# Altium PCB 100869.pcbdoc (part 2 of 3)
Units mm, origin at the board's own origin, x right, y up, seen from the top; angles counter-clockwise.
Board outline 64 x 68 mm, 4 copper layers (Top Layer, Ground, Power, Bottom Layer), stack 1.551 mm thick; 165 components, 69 nets, 488 pads, 282 vias.
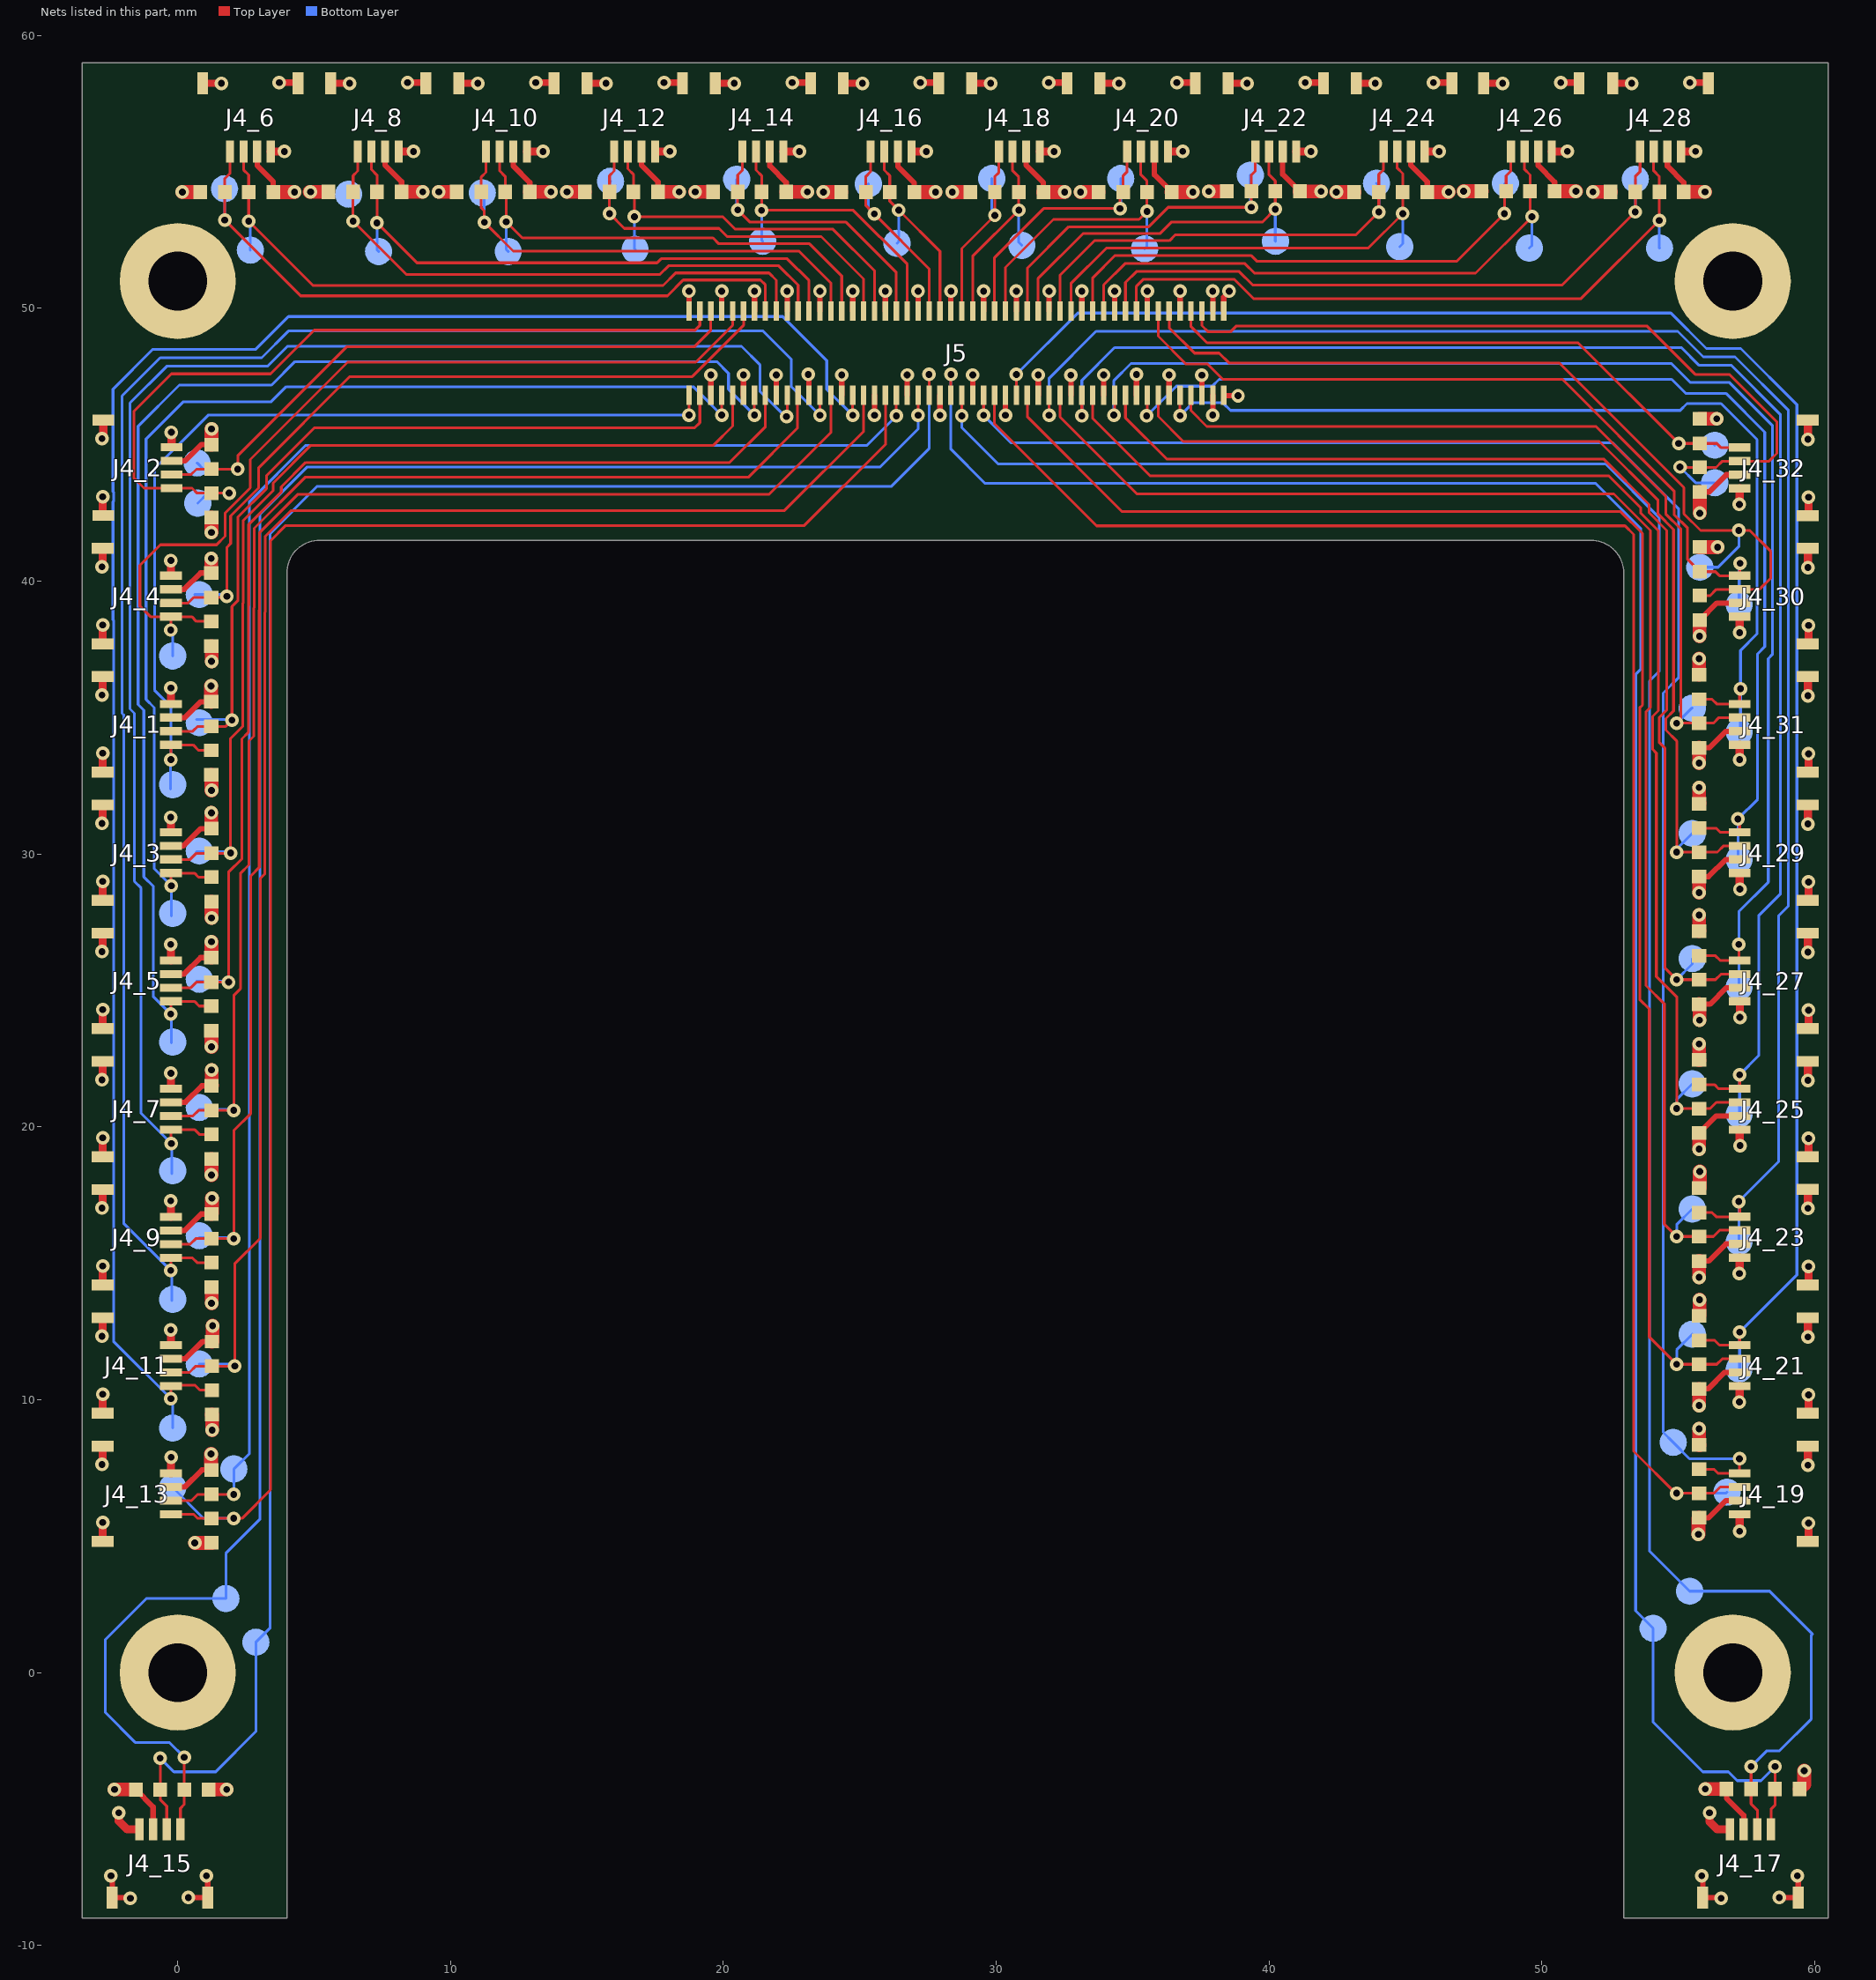
[diagram p4: the nets of this part, all layers, seen from the top]

## Via types
v1: diameter 0.5, hole 0.25, Top Layer to Bottom Layer, tented both sides, 282 vias

## Nets (pads, with @x,y where several pads share a name; then routed paths per layer and width w, separated by ;. In a path a pad name is that pad's centre, name@x,y a point inside that pad or via, vN(x,y) a via of type N, cw(c..) or ccw(c..) an arc to the next point about the centre after c; other vN are vias at no path point)
GND: J4_1.3 J4_1.5 J4_1.6 J4_2.3 J4_2.5 J4_2.6 J4_3.3 J4_3.5 J4_3.6 J4_4.3 J4_4.5 J4_4.6 J4_5.3 J4_5.5 J4_5.6 J4_6.3 J4_6.5 J4_6.6 J4_7.3 J4_7.5 J4_7.6 J4_8.3 J4_8.5 J4_8.6 J4_9.3 J4_9.5 J4_9.6 J4_10.3 J4_10.5 J4_10.6 J4_11.3 J4_11.5 J4_11.6 J4_12.3 J4_12.5 J4_12.6 J4_13.3 J4_13.5 J4_13.6 J4_14.3 J4_14.5 J4_14.6 J4_15.3 J4_15.5 J4_15.6 J4_16.3 J4_16.5 J4_16.6 J4_17.3 J4_17.5 J4_17.6 J4_18.3 J4_18.5 J4_18.6 J4_19.3 J4_19.5 J4_19.6 J4_20.3 J4_20.5 J4_20.6 J4_21.3 J4_21.5 J4_21.6 J4_22.3 J4_22.5 J4_22.6 J4_23.3 J4_23.5 J4_23.6 J4_24.3 J4_24.5 J4_24.6 J4_25.3 J4_25.5 J4_25.6 J4_26.3 J4_26.5 J4_26.6 J4_27.3 J4_27.5 J4_27.6 J4_28.3 J4_28.5 J4_28.6 J4_29.3 J4_29.5 J4_29.6 J4_30.3 J4_30.5 J4_30.6 J4_31.3 J4_31.5 J4_31.6 J4_32.3 J4_32.5 J4_32.6 J5.5 J5.11 J5.17 J5.23 J5.29 J5.35 J5.41 J5.47 J5.53 J5.59 J5.65 J5.71 J5.77 J5.83 J5.89 J5.95 J5.97 J5.98 J5.99 J5.100 M1.1 M2.1 M3.1 M4.1 R1_1.1 R1_2.1 R1_3.1 R1_4.1 R1_5.1 R1_6.1 R1_7.1 R1_8.1 R1_9.1 R1_10.1 R1_11.1 R1_12.1 R1_13.1 R1_14.1 R1_15.1 R1_16.1 R1_17.1 R1_18.1 R1_19.1 R1_20.1 R1_21.1 R1_22.1 R1_23.1 R1_24.1 R1_25.1 R1_26.1 R1_27.1 R1_28.1 R1_29.1 R1_30.1 R1_31.1 R1_32.1 R2_1.1 R2_2.1 R2_3.1 R2_4.1 R2_5.1 R2_6.1 R2_7.1 R2_8.1 R2_9.1 R2_10.1 R2_11.1 R2_12.1 R2_13.1 R2_14.1 R2_15.1 R2_16.1 R2_17.1 R2_18.1 R2_19.1 R2_20.1 R2_21.1 R2_22.1 R2_23.1 R2_24.1 R2_25.1 R2_26.1 R2_27.1 R2_28.1 R2_29.1 R2_30.1 R2_31.1 R2_32.1 | length 160
  Top Layer w0.1: v1(23.115,47.58) v1@23.14,47.555 ; J5.99@38.34,46.82 J5.99@38.362,46.798
  Top Layer w0.2: v1(-2.446,-7.453) -2.4,-7.499 J4_15.6@-2.4,-8.25 -1.76,-8.25 v1(-1.734,-8.276) ; R1_15.1@-1.539,-4.29 -0.9,-4.928 J4_15.3@-0.9,-5.75 ; J4_13.3@-0.25,6.8 0.257,6.8 0.885,7.429 R1_13.1@1.235,7.429 ; J4_11.3@-0.25,11.5 0.282,11.5 0.911,12.129 R1_11.1@1.256,12.129 ; J4_9.3@-0.25,16.2 0.257,16.2 0.86,16.804 R1_9.1@1.235,16.804 ; J4_7.3@-0.25,20.9 0.282,20.9 0.885,21.504 R1_7.1@1.235,21.504 ; J4_5.3@-0.25,25.6 0.232,25.6 0.836,26.204 R1_5.1@1.231,26.204 ; J4_3.3@-0.25,30.3 0.207,30.3 0.835,30.929 R1_3.1@1.235,30.929 ; J4_1.3@-0.25,35 0.257,35 0.836,35.579 R1_1.1@1.231,35.579 ; J4_4.3@-0.25,39.7 0.232,39.7 0.836,40.304 R1_4.1@1.231,40.304 ; J4_2.3@-0.225,44.41 0.267,44.41 ; 0.293,44.436 0.863,45.007 R1_2.1@1.235,45.007 ; v1(0.392,-8.25) J4_15.5@1.1,-8.25 1.1,-7.499 v1(1.054,-7.453) ; J4_6.3@2.914,55.75 2.914,55.236 3.504,54.646 R1_6.1@3.504,54.265 ; J4_8.3@7.6,55.75 7.6,55.25 8.204,54.646 R1_8.1@8.204,54.269 ; J4_10.3@12.3,55.75 12.3,55.218 12.904,54.614 R1_10.1@12.904,54.269 ; J4_12.3@17,55.75 17,55.243 17.604,54.639 R1_12.1@17.604,54.269 ; J5.5@19.54,46.82 v1(19.54,47.56) ; v1(20.736,47.56) 20.736,46.824 J5.11@20.74,46.82 ; J4_14.3@21.7,55.75 21.7,55.218 22.304,54.614 R1_14.1@22.304,54.269 ; J5.17@21.94,46.82 v1(21.94,47.56) ; J5.23@23.14,46.82 v1@23.14,47.555 ; J5.29@24.34,46.82 v1(24.34,47.56) ; v1(25.54,46.08) J5.35@25.54,46.82 ; J4_16.3@26.397,55.75 26.397,55.203 27,54.6 R1_16.1@27,54.265 ; J5.41@26.74,46.82 v1(26.74,47.56) ; v1(27.94,46.08) J5.47@27.94,46.82 ; J5.53@29.14,46.82 v1(29.14,47.56) ; v1(30.34,46.08) J5.59@30.34,46.82 ; J4_18.3@31.1,55.75 31.1,55.243 31.729,54.615 R1_18.1@31.729,54.265 ; J5.65@31.54,46.82 v1(31.54,47.56) ; J5.71@32.74,46.82 v1(32.74,47.552) ; J5.77@33.94,46.82 v1(33.94,47.56) ; J5.83@35.14,46.82 v1(35.14,47.58) ; J4_20.3@35.8,55.75 35.8,54.893 R1_20.1@36.429,54.265 ; J5.89@36.34,46.82 v1(36.34,47.56) ; J5.95@37.54,46.82 v1(37.54,47.552) ; v1(37.94,46.088) J5.97@37.94,46.82 ; J5.98@37.94,49.9 v1(37.94,50.632) ; J5.100@38.34,49.9 38.34,50.41 38.54,50.61 v1(38.54,50.632) ; J5.99@38.362,46.798 v1(38.865,46.798) ; J4_22.3@40.5,55.75 40.5,54.918 R1_22.1@41.129,54.29 ; J4_24.3@45.2,55.75 45.2,55.243 45.804,54.64 R1_24.1@45.804,54.265 ; J4_26.3@49.866,55.75 49.866,55.234 50.47,54.63 R1_26.1@50.47,54.294 ; J4_28.3@54.6,55.75 54.6,55.218 55.204,54.614 R1_28.1@55.204,54.269 ; R1_19.1@55.765,5.671 56.115,5.671 56.743,6.3 J4_19.3@57.25,6.3 ; R1_21.1@55.765,10.396 56.096,10.396 56.7,11 J4_21.3@57.25,11 ; R1_23.1@55.765,15.081 56.115,15.081 56.743,15.71 J4_23.3@57.25,15.71 ; R1_25.1@55.765,19.771 56.393,20.4 J4_25.3@57.25,20.4 ; R1_27.1@55.765,24.496 56.165,24.496 56.768,25.1 J4_27.3@57.25,25.1 ; R1_29.1@55.765,29.168 56.112,29.168 56.743,29.8 J4_29.3@57.25,29.8 ; R1_31.1@55.765,33.896 56.14,33.896 56.743,34.5 J4_31.3@57.25,34.5 ; R1_30.1@55.79,38.571 56.418,39.2 J4_30.3@57.25,39.2 ; R1_32.1@55.79,43.271 56.131,43.271 56.76,43.9 J4_32.3@57.25,43.9 ; v1(55.864,-7.453) 55.9,-7.489 J4_17.6@55.9,-8.25 56.55,-8.25 v1(56.576,-8.276) ; R1_17.1@56.771,-4.269 56.771,-4.611 57.4,-5.24 J4_17.3@57.4,-5.75 ; v1(58.702,-8.25) J4_17.5@59.4,-8.25 59.4,-7.489 v1(59.364,-7.453)
  Top Layer w0.254: J4_6.5@0.914,58.25 v1(1.598,58.25) ; v1(3.724,58.276) 4.388,58.276 J4_6.6@4.414,58.25 ; J4_8.5@5.6,58.25 v1(6.298,58.25) ; v1(8.424,58.276) 9.074,58.276 J4_8.6@9.1,58.25 ; J4_10.5@10.3,58.25 v1(10.998,58.25) ; v1(13.124,58.276) 13.774,58.276 J4_10.6@13.8,58.25 ; J4_12.5@15,58.25 v1(15.698,58.25) ; v1(17.824,58.276) 18.474,58.276 J4_12.6@18.5,58.25 ; J4_14.5@19.7,58.25 v1(20.398,58.25) ; v1(22.524,58.276) 23.174,58.276 J4_14.6@23.2,58.25 ; J4_16.5@24.397,58.25 v1(25.095,58.25) ; v1(27.221,58.276) 27.871,58.276 J4_16.6@27.897,58.25 ; J4_18.5@29.1,58.25 v1(29.798,58.25) ; v1(31.924,58.276) 32.574,58.276 J4_18.6@32.6,58.25 ; J4_20.5@33.8,58.25 v1(34.498,58.25) ; v1(36.624,58.276) 37.274,58.276 J4_20.6@37.3,58.25 ; J4_22.5@38.5,58.25 v1(39.198,58.25) ; v1(41.324,58.276) 41.974,58.276 J4_22.6@42,58.25 ; J4_24.5@43.2,58.25 v1(43.898,58.25) ; v1(46.024,58.276) 46.674,58.276 J4_24.6@46.7,58.25 ; J4_26.5@47.866,58.25 v1(48.564,58.25) ; v1(50.69,58.276) 51.34,58.276 J4_26.6@51.366,58.25 ; J4_28.5@52.6,58.25 v1(53.298,58.25) ; v1(55.424,58.276) 56.074,58.276 J4_28.6@56.1,58.25
  Top Layer w0.3: v1(-2.776,7.624) -2.75,7.65 J4_13.6@-2.75,8.3 ; v1(-2.776,12.324) -2.75,12.35 J4_11.6@-2.75,13 ; v1(-2.776,17.024) -2.75,17.05 J4_9.6@-2.75,17.7 ; v1(-2.776,21.724) -2.75,21.75 J4_7.6@-2.75,22.4 ; v1(-2.776,26.424) -2.75,26.45 J4_5.6@-2.75,27.1 ; v1(-2.776,31.124) -2.75,31.15 J4_3.6@-2.75,31.8 ; v1(-2.776,35.824) -2.75,35.85 J4_1.6@-2.75,36.5 ; v1(-2.776,40.524) -2.75,40.55 J4_4.6@-2.75,41.2 ; v1(-2.776,45.224) -2.725,45.275 J4_2.6@-2.725,45.91 ; J4_13.5@-2.75,4.8 v1(-2.75,5.498) ; J4_11.5@-2.75,9.5 v1(-2.75,10.198) ; J4_9.5@-2.75,14.2 v1(-2.75,14.898) ; J4_7.5@-2.75,18.9 v1(-2.75,19.598) ; J4_5.5@-2.75,23.6 v1(-2.75,24.298) ; J4_3.5@-2.75,28.3 v1(-2.75,28.998) ; J4_1.5@-2.75,33 v1(-2.75,33.698) ; J4_4.5@-2.75,37.7 v1(-2.75,38.398) ; v1(-2.75,43.098) -2.75,42.435 J4_2.5@-2.725,42.41 ; J4_19.6@59.75,4.8 59.776,4.826 v1(59.776,5.476) ; v1(59.75,7.602) J4_19.5@59.75,8.3 ; J4_21.6@59.75,9.5 59.776,9.526 v1(59.776,10.176) ; v1(59.75,12.302) J4_21.5@59.75,13 ; J4_23.6@59.75,14.21 59.776,14.236 v1(59.776,14.886) ; v1(59.75,17.012) J4_23.5@59.75,17.71 ; J4_25.6@59.75,18.9 59.776,18.926 v1(59.776,19.576) ; v1(59.75,21.702) J4_25.5@59.75,22.4 ; J4_27.6@59.75,23.6 59.776,23.626 v1(59.776,24.276) ; v1(59.75,26.402) J4_27.5@59.75,27.1 ; J4_29.6@59.75,28.3 59.776,28.326 v1(59.776,28.976) ; v1(59.75,31.102) J4_29.5@59.75,31.8 ; J4_31.6@59.75,33 59.776,33.026 v1(59.776,33.676) ; v1(59.75,35.802) J4_31.5@59.75,36.5 ; J4_30.6@59.75,37.7 59.776,37.726 v1(59.776,38.376) ; v1(59.75,40.502) J4_30.5@59.75,41.2 ; J4_32.6@59.75,42.4 59.776,42.426 v1(59.776,43.076) ; v1(59.75,45.202) J4_32.5@59.75,45.9
  Top Layer w0.5: R2_4.1@1.231,37.626 1.24,37.617 v1(1.24,37.06) ; R1_3.1@1.235,30.929 1.228,30.936 1.235,30.943 v1(1.235,31.51) ; R2_27.1@55.765,27.174 55.778,27.188 55.769,27.197 v1(55.769,27.762)
  Top Layer w0.508: v1(-2.317,-4.29) R1_15.1@-1.539,-4.29 ; v1(0.169,54.265) R2_6.1@0.826,54.265 ; v1(0.628,4.751) R2_13.1@1.235,4.751 ; R2_15.1@1.139,-4.29 v1(1.796,-4.29) ; v1(1.222,8.01) 1.222,7.442 R1_13.1@1.235,7.429 ; v1(1.222,36.16) 1.222,35.611 1.24,35.593 1.228,35.582 R1_1.1@1.231,35.579 ; R1_4.1@1.228,40.375 v1(1.228,40.835) ; R2_5.1@1.231,23.526 1.235,23.522 v1(1.235,22.935) ; R1_5.1@1.231,26.204 1.228,26.207 1.235,26.214 v1(1.235,26.785) ; R2_1.1@1.231,32.901 1.242,32.891 1.24,32.889 v1(1.24,32.335) ; R2_9.1@1.235,14.126 1.242,14.12 v1(1.242,13.535) ; R1_9.1@1.235,16.804 1.228,16.811 1.256,16.838 v1(1.256,17.385) ; v1(1.235,18.235) R2_7.1@1.235,18.826 ; R1_7.1@1.235,21.504 1.256,21.524 1.242,21.539 v1(1.242,22.085) ; R2_3.1@1.235,28.251 1.24,28.246 v1(1.24,27.66) ; v1(1.235,41.785) 1.235,42.32 1.231,42.324 R2_2.1@1.235,42.329 ; R1_2.1@1.235,45.007 1.24,45.011 v1(1.24,45.585) ; R2_11.1@1.256,9.451 1.261,9.446 v1(1.261,8.885) ; R1_11.1@1.256,12.129 1.276,12.149 v1(1.276,12.71) ; R1_6.1@3.504,54.265 v1(4.282,54.265) ; v1@4.833,54.269 R2_8.1@5.49,54.269 ; v1(4.87,54.269) R2_8.1@5.526,54.269 ; R1_8.1@8.204,54.269 v1(8.982,54.269) ; v1(9.57,54.269) R2_10.1@10.226,54.269 ; R1_10.1@12.904,54.269 v1(13.682,54.269) ; v1(14.27,54.269) R2_12.1@14.926,54.269 ; R1_12.1@17.604,54.269 v1(18.382,54.269) ; v1(18.97,54.269) R2_14.1@19.626,54.269 ; R1_14.1@22.304,54.269 v1(23.082,54.269) ; v1(23.666,54.265) R2_16.1@24.322,54.265 ; R1_16.1@27,54.265 v1(27.778,54.265) ; v1(28.394,54.265) R2_18.1@29.051,54.265 ; R1_18.1@31.729,54.265 v1(32.507,54.265) ; v1(33.094,54.265) R2_20.1@33.751,54.265 ; R1_20.1@36.429,54.265 v1(37.207,54.265) ; v1(37.794,54.29) R2_22.1@38.451,54.29 ; R1_22.1@41.129,54.29 v1(41.907,54.29) ; v1(42.469,54.265) R2_24.1@43.126,54.265 ; R1_24.1@45.804,54.265 v1(46.582,54.265) ; v1(47.136,54.294) R2_26.1@47.792,54.294 ; R1_26.1@50.47,54.294 v1(51.248,54.294) ; v1(51.869,54.269) R2_28.1@52.526,54.269 ; R1_28.1@55.204,54.269 v1(55.982,54.269) ; v1(55.74,5.06) 55.74,5.647 R1_19.1@55.765,5.671 ; v1(55.765,8.935) R2_19.1@55.765,8.349 R2_19.1@55.778,8.336 ; v1(55.765,9.785) R1_21.1@55.765,10.396 ; R2_21.1@55.765,13.074 55.778,13.088 v1(55.778,13.66) ; R1_23.1@55.765,15.081 55.769,15.077 v1(55.769,14.485) ; R2_23.1@55.765,17.759 55.79,17.784 v1(55.79,18.36) ; R1_25.1@55.765,19.771 55.768,19.768 v1(55.768,19.185) ; v1(55.765,23.035) R2_25.1@55.765,22.449 R2_25.1@55.778,22.436 ; R1_27.1@55.765,24.496 55.778,24.483 v1(55.778,23.91) ; v1(55.765,28.585) R1_29.1@55.765,29.168 ; R2_29.1@55.765,31.846 55.778,31.86 55.765,31.874 v1(55.765,32.435) ; v1(55.765,33.335) 55.765,33.887 55.769,33.892 R1_31.1@55.765,33.896 ; R2_31.1@55.765,36.574 55.768,36.577 v1(55.768,37.16) ; v1(55.778,37.985) 55.778,38.56 R1_30.1@55.79,38.571 ; R2_30.1@55.79,41.249 v1(56.447,41.249) ; v1(55.79,42.493) R1_32.1@55.79,43.271 ; R2_32.1@55.79,45.949 v1(56.415,45.949) ; v1(55.993,-4.269) R1_17.1@56.771,-4.269 ; R2_17.1@59.449,-4.269 59.62,-4.098 v1(59.62,-3.6)
SENSOR_A1: J4_1.1 J5.1 R2_1.2 TP49_1.1 | length 35.2
  Top Layer w0.1: v1(-0.25,33.46) J4_1.1@-0.25,34 0.564,34 0.763,33.801 R2_1.2@1.231,33.801 ; v1(18.74,46.088) J5.1@18.74,46.82
  Bottom Layer w0.1: TP49_1.1@-0.26,32.385 -0.26,33.45 v1(-0.25,33.46) -0.25,35.41 -0.85,36.01 -0.85,44.12 1.118,46.088 v1(18.74,46.088)
SENSOR_A2: J4_2.1 J5.4 R2_2.2 TP49_2.1 | length 30
  Top Layer w0.1: v1(1.886,43.229) R2_2.2@1.235,43.229 0.71,43.229 0.529,43.41 J4_2.1@-0.225,43.41 -1.235,43.41 -1.61,43.785 -1.61,46.22 -0.23,47.6 3.4,47.6 5,49.2 18.96,49.2 19.14,49.38 J5.4@19.14,49.9
  Bottom Layer w0.1: TP49_2.1@0.736,42.86 1.105,43.229 v1(1.886,43.229)
SENSOR_A3: J4_3.1 J5.7 R2_3.2 TP49_3.1 | length 42.9
  Top Layer w0.1: v1(-0.232,28.835) -0.25,28.853 J4_3.1@-0.25,29.3 0.614,29.3 0.763,29.151 R2_3.2@1.235,29.151 ; v1(19.94,46.088) J5.7@19.94,46.82
  Bottom Layer w0.1: TP49_3.1@-0.235,27.735 -0.235,28.832 v1(-0.232,28.835) -0.86,29.463 -0.86,35.37 -1.16,35.67 -1.16,45.21 0.21,46.58 3.43,46.58 3.98,47.13 18.898,47.13 v1(19.94,46.088)
SENSOR_A4: J4_4.1 J5.10 R2_4.2 TP49_4.1 | length 32.8
  Top Layer w0.1: v1(-0.26,38.21) -0.25,38.22 J4_4.1@-0.25,38.7 ; R2_4.2@1.231,38.526 1.228,38.529 0.685,38.529 0.514,38.7 J4_4.1@-0.25,38.7 ; J5.10@20.34,49.9 20.34,49.38 18.99,48.03 6.23,48.03 2.66,44.46 2.66,43.42 1.74,42.5 1.74,41.648 1.427,41.335 -0.635,41.335 -1.385,40.585 -1.385,39.09 -0.995,38.7 J4_4.1@-0.25,38.7
  Bottom Layer w0.1: v1(-0.26,38.21) -0.185,38.135 TP49_4.1@-0.185,37.26
SENSOR_A5: J4_5.1 J5.13 R2_5.2 TP49_5.1 | length 50.6
  Top Layer w0.1: v1(-0.26,24.135) -0.25,24.145 J4_5.1@-0.25,24.6 0.614,24.6 0.788,24.426 R2_5.2@1.231,24.426 ; v1(21.14,46.088) J5.13@21.14,46.82
  Bottom Layer w0.1: TP49_5.1@-0.226,23.085 -0.226,24.101 v1(-0.26,24.135) -0.89,24.765 -0.89,28.81 -1.24,29.16 -1.24,35.27 -1.45,35.48 -1.45,45.68 0.06,47.19 3.44,47.19 4.3,48.05 19.76,48.05 20.19,47.62 20.19,47.038 v1(21.14,46.088)
SENSOR_A6: J4_6.1 J5.16 R2_6.2 TP49_6.1 | length 26
  Top Layer w0.1: J4_6.1@1.914,55.75 1.914,54.95 1.729,54.765 1.729,54.268 R2_6.2@1.726,54.265 v1(1.726,53.238) 4.504,50.46 17.95,50.46 18.53,51.04 21.36,51.04 21.54,50.86 J5.16@21.54,49.9
  Bottom Layer w0.1: TP49_6.1@1.715,54.385 1.726,54.374 v1(1.726,53.238)
SENSOR_A7: J4_7.1 J5.19 R2_7.2 TP49_7.1 | length 58.3
  Top Layer w0.1: v1(-0.232,19.385) -0.25,19.403 J4_7.1@-0.25,19.9 0.614,19.9 0.788,19.726 R2_7.2@1.235,19.726 ; v1(22.315,46.035) 22.34,46.06 J5.19@22.34,46.82
  Bottom Layer w0.1: TP49_7.1@-0.21,18.285 -0.21,19.363 v1(-0.232,19.385) -1.34,20.493 -1.34,28.75 -1.59,29 -1.59,35.16 -1.75,35.32 -1.75,46.53 -0.4,47.88 3.29,47.88 4.02,48.61 20.665,48.61 21.34,47.935 21.34,46.965 22.27,46.035 v1(22.315,46.035)
SENSOR_A8: J4_8.1 J5.22 R2_8.2 TP49_8.1 | length 22.2
  Top Layer w0.1: J4_8.1@6.6,55.75 6.6,55.036 6.429,54.865 6.429,54.272 R2_8.2@6.426,54.269 v1(6.426,53.196) 8.382,51.24 17.67,51.24 17.99,51.56 22.033,51.56 22.74,50.853 J5.22@22.74,49.9
  Bottom Layer w0.1: TP49_8.1@6.265,54.185 6.426,54.024 v1(6.426,53.196)
SENSOR_A9: J4_9.1 J5.25 R2_9.2 TP49_9.1 | length 65.1
  Top Layer w0.1: v1(-0.26,14.735) -0.25,14.745 J4_9.1@-0.25,15.2 0.539,15.2 0.713,15.026 R2_9.2@1.235,15.026 ; v1(23.54,46.08) J5.25@23.54,46.82
  Bottom Layer w0.1: TP49_9.1@-0.21,13.635 -0.21,14.685 v1(-0.26,14.735) -1.97,16.445 -1.97,35.09 -2.04,35.16 -2.04,46.79 -0.64,48.19 3.08,48.19 4.06,49.17 21.455,49.17 22.49,48.135 22.49,47.13 v1(23.54,46.08)
SENSOR_A10: J4_10.1 J5.28 R2_10.2 TP49_10.1 | length 18.5
  Top Layer w0.1: J4_10.1@11.3,55.75 11.3,54.99 11.126,54.816 R2_10.2@11.126,54.269 11.126,53.684 11.24,53.57 v1(11.24,53.16) 12.3,52.1 22.775,52.1 23.94,50.935 J5.28@23.94,49.9
  Bottom Layer w0.1: TP49_10.1@11.165,54.235 11.24,54.16 v1(11.24,53.16)
SENSOR_A11: J4_11.1 J5.31 R2_11.2 TP49_11.1 | length 72.1
  Top Layer w0.1: v1(-0.25,10.035) J4_11.1@-0.25,10.5 ; J4_11.1@-0.25,10.525 0.639,10.525 0.813,10.351 R2_11.2@1.256,10.351 ; v1(24.74,46.08) J5.31@24.74,46.82
  Bottom Layer w0.1: TP49_11.1@-0.185,8.96 -0.185,9.97 v1(-0.25,10.035) -2.35,12.135 -2.35,38.564 -2.37,38.584 -2.37,42.913 -2.35,42.933 -2.35,43.264 -2.37,43.284 -2.37,47.04 -0.91,48.5 2.86,48.5 4.06,49.7 22.175,49.7 23.79,48.085 23.79,47.03 v1(24.74,46.08)
SENSOR_A12: J4_12.1 J5.34 R2_12.2 TP49_12.1 | length 15
  Top Layer w0.1: J4_12.1@16,55.75 16,55.036 15.829,54.865 15.829,54.272 R2_12.2@15.826,54.269 v1(15.826,53.474) 16.37,52.93 19.84,52.93 20.14,52.63 23.589,52.63 25.14,51.079 J5.34@25.14,49.9
  Bottom Layer w0.1: v1(15.826,53.474) 15.826,54.621 TP49_12.1@15.865,54.66
SENSOR_A13: J4_13.1 J5.37 R2_13.2 TP49_13.1 | length 67.5
  Top Layer w0.1: J4_13.1@-0.25,5.8 0.589,5.8 0.738,5.651 R2_13.2@1.235,5.651 v1(2.055,5.651) 2.356,5.651 3.402,6.697 3.402,41.482 3.96,42.04 22.97,42.04 25.94,45.01 J5.37@25.94,46.82
  Bottom Layer w0.1: TP49_13.1@-0.185,6.785 0.949,5.651 v1(2.055,5.651)
SENSOR_A14: J4_14.1 J5.40 R2_14.2 TP49_14.1 | length 11.5
  Top Layer w0.1: R2_14.2@20.526,54.269 v1(20.526,53.61) 20.976,53.16 24.497,53.16 26.34,51.317 J5.40@26.34,49.9 ; R2_14.2@20.529,54.272 20.529,54.89 20.7,55.061 J4_14.1@20.7,55.75
  Bottom Layer w0.1: TP49_14.1@20.49,54.735 20.49,53.646 v1(20.526,53.61)
SENSOR_A15: J4_15.1 J5.43 R2_15.2 TP49_15.1 | length 80.9
  Top Layer w0.1: J4_15.1@0.1,-5.75 0.1,-4.976 0.236,-4.84 0.236,-4.293 R2_15.2@0.239,-4.29 v1@0.239,-3.111 ; v1(27.14,46.08) J5.43@27.14,46.82
  Bottom Layer w0.1: v1(0.24,-3.11) -0.31,-2.56 -1.56,-2.56 -2.65,-1.47 -2.65,1.21 -1.15,2.71 TP49_15.1@1.765,2.71 1.765,4.365 3.01,5.61 3.01,42.45 4.75,44.19 25.75,44.19 27.14,45.58 v1(27.14,46.08)
SENSOR_A16: J4_16.1 J5.46 R2_16.2 TP49_16.1 | length 8.1
  Top Layer w0.1: J4_16.1@25.397,55.75 25.397,55.011 25.222,54.837 R2_16.2@25.222,54.265 25.222,53.771 v1(25.533,53.46) 27.54,51.453 J5.46@27.54,49.9
  Bottom Layer w0.1: TP49_16.1@25.315,54.56 25.315,53.678 v1(25.533,53.46)
SENSOR_A17: J4_17.1 J5.49 R2_17.2 TP49_17.1 | length 82
  Top Layer w0.1: J5.49@28.34,46.82 v1(28.34,47.58) ; J4_17.1@58.4,-5.75 58.4,-5.011 58.546,-4.865 58.546,-4.272 R2_17.2@58.549,-4.269 v1(58.549,-3.449)
  Bottom Layer w0.1: v1(28.34,47.58) 28.34,44.835 29.585,43.59 51.97,43.59 53.62,41.94 53.62,36.765 53.44,36.585 53.44,2.26 TP49_17.1@54.08,1.62 54.08,-1.82 55.9,-3.64 56.84,-3.64 57.164,-3.964 58.034,-3.964 v1(58.549,-3.449)
SENSOR_A18: J4_18.1 J5.52 R2_18.2 TP49_18.1 | length 7.8
  Top Layer w0.1: J5.52@28.74,49.9 28.74,52.197 v1(29.951,53.408) R2_18.2@29.951,54.265 29.951,54.837 30.1,54.986 J4_18.1@30.1,55.75
  Bottom Layer w0.1: TP49_18.1@29.84,54.76 29.84,53.518 v1(29.951,53.408)
SENSOR_A19: J4_19.1 J5.55 R2_19.2 TP49_19.1 | length 67
  Top Layer w0.1: v1(29.54,46.08) J5.55@29.54,46.82 ; R2_19.2@55.765,7.449 55.768,7.446 56.315,7.446 56.461,7.3 J4_19.1@57.25,7.3 ; J4_19.1@57.244,7.306 v1(57.244,7.836)
  Bottom Layer w0.1: v1(29.54,46.08) 30.55,45.07 52.6,45.07 55.01,42.66 55.01,36.46 54.45,35.9 54.45,8.8 TP49_19.1@54.815,8.435 55.414,7.836 v1(57.244,7.836)
SENSOR_A20: J4_20.1 J5.58 R2_20.2 TP49_20.1 | length 10.6
  Top Layer w0.1: J5.58@29.94,49.9 29.94,51.86 31.74,53.66 v1(34.54,53.66) 34.54,54.154 R2_20.2@34.651,54.265 ; R2_20.2@34.654,54.268 34.654,54.865 34.8,55.011 J4_20.1@34.8,55.75
  Bottom Layer w0.1: v1(34.54,53.66) 34.565,53.685 TP49_20.1@34.565,54.76
SENSOR_A21: J4_21.1 J5.61 R2_21.2 TP49_21.1 | length 69.9
  Top Layer w0.1: J5.61@30.74,46.82 v1(30.74,47.58) ; R2_21.2@55.765,12.174 55.768,12.171 56.34,12.171 56.511,12 J4_21.1@57.25,12 v1(57.25,12.475)
  Bottom Layer w0.1: v1(30.74,47.58) 32.99,49.83 54.73,49.83 56.03,48.53 57.29,48.53 59.35,46.47 59.35,14.575 v1(57.25,12.475) 57.25,11.144 TP49_21.1@57.234,11.128
SENSOR_A22: J4_22.1 J5.64 R2_22.2 TP49_22.1 | length 14
  Top Layer w0.1: J5.64@31.14,49.9 31.14,51.47 32.66,52.99 35.59,52.99 36.306,53.706 v1(39.351,53.706) R2_22.2@39.351,54.29 ; R2_22.2@39.354,54.293 39.354,54.89 39.5,55.036 J4_22.1@39.5,55.75
  Bottom Layer w0.1: TP49_22.1@39.315,54.885 39.315,53.742 v1(39.351,53.706)
SENSOR_A23: J4_23.1 J5.67 R2_23.2 TP49_23.1 | length 64.4
  Top Layer w0.1: v1(31.94,46.08) J5.67@31.94,46.82 ; R2_23.2@55.765,16.859 55.768,16.856 56.24,16.856 56.393,16.703 J4_23.1@57.221,16.703 ; v1(57.221,17.264) 57.25,17.235 J4_23.1@57.25,16.71
  Bottom Layer w0.1: v1(31.94,46.08) 31.94,47.44 33.66,49.16 54.98,49.16 55.92,48.22 57.08,48.22 59.04,46.26 59.04,28.1 58.68,27.74 58.68,18.723 v1(57.221,17.264) 57.221,15.809 TP49_23.1@57.234,15.796
SENSOR_A24: J4_24.1 J5.70 R2_24.2 TP49_24.1 | length 17.3
  Top Layer w0.1: J5.70@32.34,49.9 32.34,51.22 33.6,52.48 36.35,52.48 36.57,52.7 43.191,52.7 v1(44.026,53.535) R2_24.2@44.026,54.265 44.026,54.912 44.2,55.086 J4_24.1@44.2,55.75
  Bottom Layer w0.1: TP49_24.1@43.94,54.585 44.026,54.499 v1(44.026,53.535)
SENSOR_A25: J4_25.1 J5.73 R2_25.2 TP49_25.1 | length 57.5
  Top Layer w0.1: v1@33.14,46.07 J5.73@33.14,46.82 J5.73@33.14,46.83 ; R2_25.2@55.765,21.549 56.326,21.549 56.475,21.4 J4_25.1@57.25,21.4 v1(57.25,21.91)
  Bottom Layer w0.1: v1(33.14,46.06) 33.14,47.36 34.34,48.56 55.12,48.56 55.77,47.91 56.95,47.91 58.74,46.12 58.74,28.53 57.95,27.74 57.95,22.61 v1(57.25,21.91) 57.25,20.48 TP49_25.1@57.234,20.464
SENSOR_A26: J4_26.1 J5.76 R2_26.2 TP49_26.1 | length 21
  Top Layer w0.1: J5.76@33.54,49.9 33.54,51.12 34.36,51.94 39.34,51.94 39.55,51.73 46.889,51.73 v1(48.63,53.471) 48.63,54.232 R2_26.2@48.692,54.294 48.692,54.862 48.866,55.036 J4_26.1@48.866,55.75
  Bottom Layer w0.1: v1(48.63,53.471) 48.63,54.55 TP49_26.1@48.665,54.585
SENSOR_A27: J4_27.1 J5.79 R2_27.2 TP49_27.1 | length 50.6
  Top Layer w0.1: v1(34.315,46.088) 34.34,46.113 J5.79@34.34,46.82 ; R2_27.2@55.765,26.274 55.768,26.271 56.365,26.271 56.536,26.1 J4_27.1@57.25,26.1 57.221,26.129 v1(57.221,26.685)
  Bottom Layer w0.1: v1(34.315,46.088) 34.315,47.355 34.94,47.98 54.75,47.98 55.45,47.28 56.88,47.28 58.45,45.71 58.45,37.31 58.3,37.16 58.3,28.97 57.221,27.891 v1(57.221,26.685) 57.221,25.144 TP49_27.1@57.234,25.131
SENSOR_A28: J4_28.1 J5.82 R2_28.2 TP49_28.1 | length 24.7
  Top Layer w0.1: J5.82@34.74,49.9 34.74,50.95 35.14,51.35 38.91,51.35 39.4,50.86 50.751,50.86 v1(53.426,53.535) R2_28.2@53.426,54.269 ; R2_28.2@53.429,54.272 53.429,54.84 53.6,55.011 J4_28.1@53.6,55.75
  Bottom Layer w0.1: v1(53.426,53.535) TP49_28.1@53.426,54.735
SENSOR_A29: J4_29.1 J5.85 R2_29.2 TP49_29.1 | length 42.9
  Top Layer w0.1: v1(35.515,46.06) 35.54,46.085 J5.85@35.54,46.82 ; R2_29.2@55.765,30.946 56.389,30.946 56.536,30.8 J4_29.1@57.25,30.8 57.25,31.225 v1(57.19,31.285)
  Bottom Layer w0.1: v1(35.515,46.06) 36.605,47.15 37.92,47.15 38.17,47.4 54.76,47.4 55.275,46.885 56.745,46.885 58.17,45.46 58.17,37.6 57.91,37.34 57.91,32.005 v1(57.19,31.285) 57.19,29.843 TP49_29.1@57.234,29.799
SENSOR_A30: J4_30.1 J5.88 R2_30.2 TP49_30.1 | length 29.1
  Top Layer w0.1: J5.88@35.94,49.9 35.94,48.98 36.96,47.96 37.75,47.96 38.31,47.4 49.89,47.4 50.76,47.4 54.85,43.31 54.85,42.44 55.34,41.95 55.34,40.799 R2_30.2@55.79,40.349 56.362,40.349 56.511,40.2 J4_30.1@57.25,40.2 57.25,40.643 v1(57.267,40.66)
  Bottom Layer w0.1: TP49_30.1@57.234,39.135 57.234,40.626 v1(57.267,40.66)
SENSOR_A31: J4_31.1 J5.91 R2_31.2 TP49_31.1 | length 36
  Top Layer w0.1: v1(36.74,46.07) J5.91@36.74,46.82 ; R2_31.2@55.765,35.674 56.237,35.674 56.411,35.5 J4_31.1@57.25,35.5 57.25,36.026 v1(57.284,36.06)
  Bottom Layer w0.1: v1(36.74,46.07) 37.21,46.54 38.31,46.54 38.59,46.26 55.07,46.26 55.32,46.51 56.57,46.51 57.89,45.19 57.89,38.07 57.284,37.464 v1(57.284,36.06) 57.284,34.517 TP49_31.1@57.234,34.467
SENSOR_A32: J4_32.1 J5.94 R2_32.2 TP49_32.1 | length 23.9
  Top Layer w0.1: J5.94@37.14,49.9 37.14,49.33 37.73,48.74 51.327,48.74 55.018,45.049 R2_32.2@55.79,45.049 56.412,45.049 56.561,44.9 J4_32.1@57.25,44.9
  Bottom Layer w0.1: v1(55.015,45.046) 56.279,45.046 TP49_32.1@56.34,44.985
SENSOR_B1: J4_1.2 J5.3 R1_1.2 TP48_1.1 | length 30.9
  Top Layer w0.1: J4_1.2@-0.25,34.5 0.557,34.5 0.736,34.679 R1_1.2@1.231,34.679 1.759,34.679 v1(1.99,34.91) 1.99,39.069 2.202,39.282 2.202,42.342 3.25,43.39 3.25,43.86 5.01,45.62 18.95,45.62 19.14,45.81 J5.3@19.14,46.82
  Bottom Layer w0.1: TP48_1.1@0.69,34.935 1.965,34.935 v1(1.99,34.91)
SENSOR_B2: J4_2.2 J5.6 R1_2.2 TP48_2.1 | length 24.5
  Top Layer w0.1: J4_2.2@-0.225,43.91 0.492,43.91 0.688,44.107 R1_2.2@1.235,44.107 v1(2.202,44.107) 2.202,44.602 6.19,48.59 18.93,48.59 19.54,49.2 J5.6@19.54,49.9
  Bottom Layer w0.1: TP48_2.1@0.71,44.335 0.939,44.107 v1(2.202,44.107)
SENSOR_B3: J4_3.2 J5.9 R1_3.2 TP48_3.1 | length 36.6
  Top Layer w0.1: J4_3.2@-0.25,29.8 0.457,29.8 0.685,30.029 R1_3.2@1.235,30.029 1.93,30.029 v1(1.936,30.035) 1.936,34.236 2.39,34.69 2.39,39.186 2.402,39.199 2.402,42.222 3.5,43.32 3.5,43.6 4.88,44.98 19.635,44.98 20.34,45.685 J5.9@20.34,46.82
  Bottom Layer w0.1: TP48_3.1@0.689,30.085 1.886,30.085 v1(1.936,30.035)
SENSOR_B4: J4_4.2 J5.12 R1_4.2 TP48_4.1 | length 29
  Top Layer w0.1: J4_4.2@-0.25,39.2 0.382,39.2 0.586,39.404 R1_4.2@1.231,39.404 1.759,39.404 v1(1.802,39.447) 1.802,41.243 1.94,41.38 1.94,42.39 2.96,43.41 2.96,44.15 6.31,47.5 18.86,47.5 20.74,49.38 J5.12@20.74,49.9
  Bottom Layer w0.1: TP48_4.1@0.628,39.51 1.74,39.51 v1(1.802,39.447)
SENSOR_B5: J4_5.2 J5.15 R1_5.2 TP48_5.1 | length 42.2
  Top Layer w0.1: J4_5.2@-0.25,25.1 0.482,25.1 0.686,25.304 R1_5.2@1.231,25.304 v1(1.865,25.304) 1.865,29.335 2.35,29.82 2.35,34.22 2.59,34.46 2.59,39.104 2.602,39.116 2.602,42.082 3.796,43.276 3.796,43.456 4.69,44.35 20.23,44.35 21.54,45.66 J5.15@21.54,46.82
  Bottom Layer w0.1: TP48_5.1@0.69,25.335 1.834,25.335 v1(1.865,25.304)
SENSOR_B6: J4_6.2 J5.18 R1_6.2 TP48_6.1 | length 25.5
  Top Layer w0.1: J4_6.2@2.414,55.75 2.414,55.079 2.604,54.89 R1_6.2@2.604,54.265 v1(2.604,53.196) 4.96,50.84 17.79,50.84 18.25,51.3 21.671,51.3 21.94,51.031 J5.18@21.94,49.9
  Bottom Layer w0.1: v1(2.604,53.196) 2.665,53.135 TP48_6.1@2.665,52.135
SENSOR_B7: J4_7.2 J5.21 R1_7.2 TP48_7.1 | length 48
  Top Layer w0.1: J4_7.2@-0.25,20.4 0.557,20.4 0.76,20.604 R1_7.2@1.235,20.604 v1(2.055,20.604) 2.055,24.815 2.3,25.06 2.3,29.29 2.61,29.6 2.61,34.14 2.79,34.32 2.79,39.021 2.802,39.033 2.802,41.942 4.67,43.81 20.915,43.81 22.718,45.613 22.718,46.798 J5.21@22.74,46.82
  Bottom Layer w0.1: TP48_7.1@0.79,20.635 2.024,20.635 v1(2.055,20.604)
SENSOR_B8: J4_8.2 J5.24 R1_8.2 TP48_8.1 | length 21.7
  Top Layer w0.1: J4_8.2@7.1,55.75 7.1,55.093 7.304,54.889 R1_8.2@7.304,54.269 v1(7.304,53.135) 8.769,51.67 17.57,51.67 17.72,51.82 22.341,51.82 23.14,51.021 J5.24@23.14,49.9
  Bottom Layer w0.1: v1(7.304,53.135) 7.304,52.146 TP48_8.1@7.365,52.085
SENSOR_B9: J4_9.2 J5.27 R1_9.2 TP48_9.1 | length 53.8
  Top Layer w0.1: J4_9.2@-0.25,15.7 0.457,15.7 0.66,15.904 R1_9.2@1.235,15.904 v1(2.055,15.904) 2.055,19.865 2.68,20.49 2.68,29.2 2.99,29.51 2.99,38.938 3.002,38.95 3.002,41.782 4.41,43.19 21.684,43.19 23.94,45.446 J5.27@23.94,46.82
  Bottom Layer w0.1: TP48_9.1@0.79,15.935 2.024,15.935 v1(2.055,15.904) v1@2.012,15.86
SENSOR_B10: J4_10.2 J5.30 R1_10.2 TP48_10.1 | length 18.2
  Top Layer w0.1: J4_10.2@11.8,55.75 11.8,55.04 12.004,54.836 R1_10.2@12.004,54.269 ; R1_10.2@12.004,54.269 12.04,54.233 v1(12.04,53.174) 12.634,52.58 19.62,52.58 19.83,52.37 23.156,52.37 24.34,51.186 J5.30@24.34,49.9
  Bottom Layer w0.1: v1(12.04,53.174) 12.04,52.16 TP48_10.1@12.115,52.085
SENSOR_B11: J4_11.2 J5.33 R1_11.2 TP48_11.1 | length 59.5
  Top Layer w0.1: J4_11.2@-0.25,11 0.432,11 0.661,11.229 R1_11.2@1.256,11.229 v1(2.09,11.229) 2.09,14.98 3.03,15.92 3.03,29.11 3.19,29.27 3.19,38.855 3.202,38.868 3.202,41.632 4.16,42.59 22.245,42.59 25.14,45.485 J5.33@25.14,46.82
  Bottom Layer w0.1: TP48_11.1@0.79,11.31 2.009,11.31 v1(2.09,11.229)
SENSOR_B12: J4_12.2 J5.36 R1_12.2 TP48_12.1 | length 14.8
  Top Layer w0.1: J4_12.2@16.5,55.75 16.5,55.118 16.704,54.915 16.704,54.27 16.74,54.233 v1(16.74,53.36) 19.98,53.36 20.44,52.9 24.021,52.9 25.54,51.381 J5.36@25.54,49.9
  Bottom Layer w0.1: v1(16.74,53.36) 16.74,52.185 TP48_12.1@16.765,52.16
SENSOR_B13: J4_13.2 J5.39 R1_13.2 TP48_13.1 | length 64.8
  Top Layer w0.1: J4_13.2@-0.25,6.3 0.507,6.3 0.735,6.529 R1_13.2@1.235,6.529 v1(2.055,6.529) ; v1(26.34,46.06) J5.39@26.34,46.82
  Bottom Layer w0.1: v1(2.055,6.529) 2.055,7.45 2.63,8.025 2.63,42.92 4.68,44.97 25.25,44.97 v1(26.34,46.06)
SENSOR_B14: J4_14.2 J5.42 R1_14.2 TP48_14.1 | length 11.3
  Top Layer w0.1: J4_14.2@21.2,55.75 21.2,55.068 21.404,54.864 R1_14.2@21.404,54.269 v1(21.404,53.596) 24.761,53.596 26.74,51.617 J5.42@26.74,49.9
  Bottom Layer w0.1: v1(21.404,53.596) 21.404,52.496 TP48_14.1@21.44,52.46
SENSOR_B15: J4_15.2 J5.45 R1_15.2 TP48_15.1 | length 80.1
  Top Layer w0.1: v1(-0.64,-3.14) -0.639,-3.141 R1_15.2@-0.639,-4.29 -0.639,-4.661 -0.4,-4.9 J4_15.2@-0.4,-5.75 ; J5.45@27.54,46.82 v1(27.54,47.58)
  Bottom Layer w0.1: v1(-0.64,-3.14) -0.14,-3.64 1.39,-3.64 2.865,-2.165 TP48_15.1@2.865,1.11 3.39,1.635 3.39,41.76 5.1,43.47 26.15,43.47 27.54,44.86 v1(27.54,47.58)
SENSOR_B16: J4_16.2 J5.48 R1_16.2 TP48_16.1 | length 7.9
  Top Layer w0.1: J4_16.2@25.897,55.75 25.897,55.068 26.1,54.865 R1_16.2@26.1,54.265 26.1,53.929 v1(26.43,53.6) 27.94,52.09 J5.48@27.94,49.9
  Bottom Layer w0.1: TP48_16.1@26.365,52.385 26.43,52.45 v1(26.43,53.6)
SENSOR_B17: J4_17.2 J5.51 R1_17.2 TP48_17.1 | length 81.8
  Top Layer w0.1: v1(28.74,46.06) J5.51@28.74,46.82 ; v1(57.671,-3.449) R1_17.2@57.671,-4.269 57.671,-4.814 57.9,-5.043 J4_17.2@57.9,-5.75
  Bottom Layer w0.1: v1(28.74,46.06) 28.74,45.63 30.07,44.3 52.34,44.3 54.3,42.34 54.3,36.69 53.95,36.34 53.95,4.45 TP48_17.1@55.42,2.98 58.35,2.98 59.92,1.41 59.88,1.37 59.88,-1.7 58.71,-2.87 58.25,-2.87 v1(57.671,-3.449)
SENSOR_B18: J4_18.2 J5.54 R1_18.2 TP48_18.1 | length 8
  Top Layer w0.1: J5.54@29.14,49.9 29.14,51.911 v1(30.829,53.6) R1_18.2@30.829,54.265 30.829,54.815 30.6,55.043 J4_18.2@30.6,55.75
  Bottom Layer w0.1: v1(30.829,53.6) 30.829,52.421 TP48_18.1@30.94,52.31
SENSOR_B19: J4_19.2 J5.57 R1_19.2 TP48_19.1 | length 66.3
  Top Layer w0.1: J5.57@29.94,46.82 29.94,45.77 33.68,42.03 53.05,42.03 53.365,41.715 53.365,8.108 v1@54.945,6.529 ; v1(54.945,6.571) R1_19.2@55.765,6.571 56.315,6.571 56.543,6.8 J4_19.2@57.25,6.8
  Bottom Layer w0.1: v1(54.945,6.571) 56.751,6.571 TP48_19.1@56.79,6.61
SENSOR_B20: J4_20.2 J5.60 R1_20.2 TP48_20.1 | length 11.3
  Top Layer w0.1: J5.60@30.34,49.9 30.34,51.5 32.1,53.26 35.236,53.26 v1(35.529,53.552) R1_20.2@35.529,54.265 35.529,54.671 35.3,54.9 J4_20.2@35.3,55.75
  Bottom Layer w0.1: TP48_20.1@35.44,52.185 35.529,52.274 v1(35.529,53.552)
SENSOR_B21: J4_21.2 J5.63 R1_21.2 TP48_21.1 | length 59.9
  Top Layer w0.1: J5.63@31.14,46.82 31.14,46.03 34.62,42.55 52.89,42.55 53.69,41.75 53.69,35.46 53.59,35.36 53.59,24.67 53.94,24.32 53.94,12.301 v1(54.945,11.296) R1_21.2@55.765,11.296 56.415,11.296 56.618,11.5 J4_21.2@57.25,11.5
  Bottom Layer w0.1: v1(54.945,11.296) 54.945,11.829 TP48_21.1@55.515,12.399
SENSOR_B22: J4_22.2 J5.66 R1_22.2 TP48_22.1 | length 14.3
  Top Layer w0.1: J5.66@31.54,49.9 31.54,51.1 33.18,52.74 36,52.74 36.42,53.16 39.754,53.16 v1(40.229,53.635) R1_22.2@40.229,54.29 40.229,54.671 40,54.9 J4_22.2@40,55.75
  Bottom Layer w0.1: v1(40.229,53.635) 40.229,52.471 TP48_22.1@40.24,52.46
SENSOR_B23: J4_23.2 J5.69 R1_23.2 TP48_23.1 | length 54.2
  Top Layer w0.1: J5.69@32.34,46.82 32.34,46.02 35.16,43.2 52.642,43.2 53.98,41.862 53.98,35.375 53.82,35.215 53.82,25.18 54.49,24.51 54.49,16.436 v1(54.945,15.981) R1_23.2@55.765,15.981 56.29,15.981 56.518,16.21 J4_23.2@57.25,16.21
  Bottom Layer w0.1: v1(54.945,15.981) 54.945,16.418 TP48_23.1@55.515,16.989
SENSOR_B24: J4_24.2 J5.72 R1_24.2 TP48_24.1 | length 17.9
  Top Layer w0.1: J5.72@32.74,49.9 32.74,50.91 34.04,52.21 43.642,52.21 v1(44.904,53.471) R1_24.2@44.904,54.265 44.904,54.94 44.7,55.143 J4_24.2@44.7,55.75
  Bottom Layer w0.1: TP48_24.1@44.79,52.26 44.904,52.374 v1(44.904,53.471)
SENSOR_B25: J4_25.2 J5.75 R1_25.2 TP48_25.1 | length 48.6
  Top Layer w0.1: J5.75@33.54,46.82 33.54,45.96 35.64,43.86 52.46,43.86 53.62,42.7 53.62,42.505 54.27,41.855 54.27,35.253 54.06,35.043 54.06,33.84 54.2,33.7 54.2,25.51 54.945,24.765 v1(54.945,20.671) R1_25.2@55.765,20.671 56.171,20.671 56.4,20.9 J4_25.2@57.25,20.9
  Bottom Layer w0.1: v1(54.945,20.671) 54.945,21.007 TP48_25.1@55.515,21.578
SENSOR_B26: J4_26.2 J5.78 R1_26.2 TP48_26.1 | length 21.7
  Top Layer w0.1: J5.78@33.94,49.9 33.94,50.86 34.72,51.64 39.12,51.64 39.47,51.29 47.57,51.29 v1(49.64,53.36) 49.57,53.43 R1_26.2@49.57,54.294 49.57,54.89 49.366,55.093 J4_26.2@49.366,55.75
  Bottom Layer w0.1: TP48_26.1@49.54,52.21 49.64,52.31 v1(49.64,53.36)
SENSOR_B27: J4_27.2 J5.81 R1_27.2 TP48_27.1 | length 42.8
  Top Layer w0.1: J5.81@34.74,46.82 34.74,45.99 36.25,44.48 52.26,44.48 53.93,42.81 53.93,42.511 54.58,41.861 54.58,35.28 54.31,35.01 54.31,34.08 54.52,33.87 54.52,25.821 v1(54.945,25.396) R1_27.2@55.765,25.396 56.365,25.396 56.568,25.6 J4_27.2@57.25,25.6
  Bottom Layer w0.1: v1(54.945,25.396) 55.515,25.967 TP48_27.1@55.515,26.167
SENSOR_B28: J4_28.2 J5.84 R1_28.2 TP48_28.1 | length 25.3
  Top Layer w0.1: J5.84@35.14,49.9 35.14,50.81 35.4,51.07 38.72,51.07 39.43,50.36 51.44,50.36 v1(54.304,53.224) R1_28.2@54.304,54.269 54.304,54.839 54.1,55.043 J4_28.2@54.1,55.75
  Bottom Layer w0.1: v1(54.304,53.224) 54.304,52.221 TP48_28.1@54.315,52.21
SENSOR_B29: J4_29.2 J5.87 R1_29.2 TP48_29.1 | length 37.1
  Top Layer w0.1: J5.87@35.94,46.82 35.94,46.04 36.86,45.12 52.11,45.12 54.26,42.97 54.26,42.464 54.83,41.894 54.83,35.248 54.545,34.962 54.545,34.545 54.945,34.145 v1(54.945,30.068) R1_29.2@55.765,30.068 56.437,30.068 56.668,30.3 J4_29.2@57.25,30.3
  Bottom Layer w0.1: v1(54.945,30.068) 54.945,30.186 TP48_29.1@55.515,30.756
SENSOR_B30: J4_30.2 J5.90 R1_30.2 TP48_30.1 | length 32.8
  Top Layer w0.1: J5.90@36.34,49.9 36.34,49.29 37.27,48.36 38.17,48.36 38.53,48 50.64,48 55.21,43.43 55.21,42.47 55.82,41.86 v1(57.221,41.86) 57.625,41.86 58.394,41.091 58.394,40.114 57.98,39.7 56.4,39.7 56.171,39.471 R1_30.2@55.79,39.471
  Bottom Layer w0.1: TP48_30.1@55.793,40.51 56.465,40.51 57.221,41.266 v1(57.221,41.86)
SENSOR_B31: J4_31.2 J5.93 R1_31.2 TP48_31.1 | length 31.1
  Top Layer w0.1: J5.93@37.14,46.82 37.14,46.25 37.72,45.67 51.99,45.67 54.54,43.12 54.54,42.467 55.1,41.907 55.1,34.952 v1(54.945,34.796) R1_31.2@55.765,34.796 56.29,34.796 56.493,35 J4_31.2@57.25,35
  Bottom Layer w0.1: v1(54.945,34.796) 55.494,35.346 TP48_31.1@55.515,35.346
SENSOR_B32: J4_32.2 J5.96 R1_32.2 TP48_32.1 | length 29.7
  Top Layer w0.1: J5.96@37.54,49.9 37.54,49.37 37.77,49.14 38.58,49.14 38.79,49.35 53.86,49.35 55.64,47.57 56.89,47.57 58.615,45.845 58.615,44.685 58.33,44.4 56.618,44.4 56.39,44.171 R1_32.2@55.79,44.171 55.079,44.171 v1(55.065,44.185)
  Bottom Layer w0.1: v1(55.065,44.185) 55.64,43.61 TP48_32.1@56.34,43.61
SENSOR_VCC1: J4_1.4 J4_2.4 J4_3.4 J4_4.4 J4_5.4 J4_6.4 J4_7.4 J4_8.4 J5.2 J5.8 J5.14 J5.20 | length 7.4
  Top Layer w0.2: J5.2@18.74,49.9 v1(18.74,50.632) ; J5.8@19.94,49.9 v1(19.94,50.632) ; J5.14@21.14,49.9 v1(21.14,50.632) ; J5.20@22.34,49.9 v1(22.34,50.632)
  Top Layer w0.3: v1(-0.26,26.686) -0.25,26.676 J4_5.4@-0.25,26.1 ; v1(-0.26,31.343) -0.25,31.333 J4_3.4@-0.25,30.8 ; J4_7.4@-0.25,21.4 v1(-0.25,21.965) ; J4_1.4@-0.25,35.5 v1(-0.25,36.086) ; J4_4.4@-0.25,40.2 v1(-0.25,40.76) ; v1(-0.232,45.46) -0.225,45.453 J4_2.4@-0.225,44.91 ; J4_6.4@3.414,55.75 v1(3.91,55.75) ; J4_8.4@8.1,55.75 v1(8.64,55.75)
SENSOR_VCC2: J4_9.4 J4_10.4 J4_11.4 J4_12.4 J4_13.4 J4_14.4 J4_15.4 J4_16.4 J5.26 J5.32 J5.38 J5.44 | length 8.1
  Top Layer w0.2: J5.26@23.54,49.9 v1(23.54,50.632) ; J5.32@24.74,49.9 v1(24.74,50.632) ; J5.38@25.94,49.9 v1(25.94,50.632) ; J5.44@27.14,49.9 v1(27.14,50.632)
  Top Layer w0.3: v1(-2.164,-5.14) -2.164,-5.44 -1.853,-5.75 J4_15.4@-1.446,-5.75 ; v1(-0.26,12.56) -0.25,12.55 J4_11.4@-0.25,12 ; v1(-0.26,17.286) -0.25,17.276 J4_9.4@-0.25,16.7 ; J4_13.4@-0.25,7.3 -0.25,7.879 v1(-0.242,7.886) ; J4_10.4@12.8,55.75 v1(13.386,55.75) ; J4_12.4@17.5,55.75 18.03,55.75 v1(18.04,55.76) ; J4_14.4@22.2,55.75 v1(22.786,55.75) ; J4_16.4@26.897,55.75 v1(27.44,55.75)
SENSOR_VCC3: J4_17.4 J4_18.4 J4_19.4 J4_20.4 J4_21.4 J4_22.4 J4_23.4 J4_24.4 J5.50 J5.56 J5.62 J5.68 | length 8
  Top Layer w0.2: J5.50@28.34,49.9 v1(28.34,50.632) ; J5.56@29.54,49.9 v1(29.54,50.632) ; J5.62@30.74,49.9 v1(30.74,50.632) ; J5.68@31.94,49.9 v1(31.94,50.632)
  Top Layer w0.3: J4_18.4@31.6,55.75 v1(32.122,55.75) ; J4_20.4@36.3,55.75 36.83,55.75 v1(36.84,55.76) ; J4_22.4@41,55.75 v1(41.54,55.75) ; J4_24.4@45.7,55.75 v1(46.24,55.75) ; v1(56.146,-5.14) 56.146,-5.465 56.432,-5.75 J4_17.4@56.864,-5.75 ; v1(57.24,9.914) 57.25,9.924 J4_21.4@57.25,10.5 ; v1(57.24,14.624) 57.25,14.634 J4_23.4@57.25,15.21 ; v1(57.25,5.177) J4_19.4@57.25,5.8
SENSOR_VCC4: J4_25.4 J4_26.4 J4_27.4 J4_28.4 J4_29.4 J4_30.4 J4_31.4 J4_32.4 J5.74 J5.80 J5.86 J5.92 | length 7.5
  Top Layer w0.2: J5.74@33.14,49.9 v1(33.14,50.632) ; J5.80@34.34,49.9 v1(34.34,50.632) ; J5.86@35.54,49.9 v1(35.54,50.632) ; J5.92@36.74,49.9 v1(36.74,50.632)
  Top Layer w0.3: J4_26.4@50.366,55.75 50.93,55.75 v1(50.94,55.76) ; J4_28.4@55.1,55.75 55.63,55.75 v1(55.64,55.76) ; v1(57.24,42.814) 57.25,42.824 J4_32.4@57.25,43.4 ; J4_25.4@57.25,19.9 57.25,19.331 v1(57.267,19.314) ; J4_27.4@57.25,24.6 57.26,24.59 v1(57.26,24.014) ; J4_29.4@57.25,29.3 57.25,28.724 v1(57.26,28.714) ; v1(57.25,33.46) J4_31.4@57.25,34 ; v1(57.25,38.114) J4_30.4@57.25,38.7